# EAGLE board EL-100-020-001-maincontrlunit (EAGLE 6.6.0), part 1 of 2
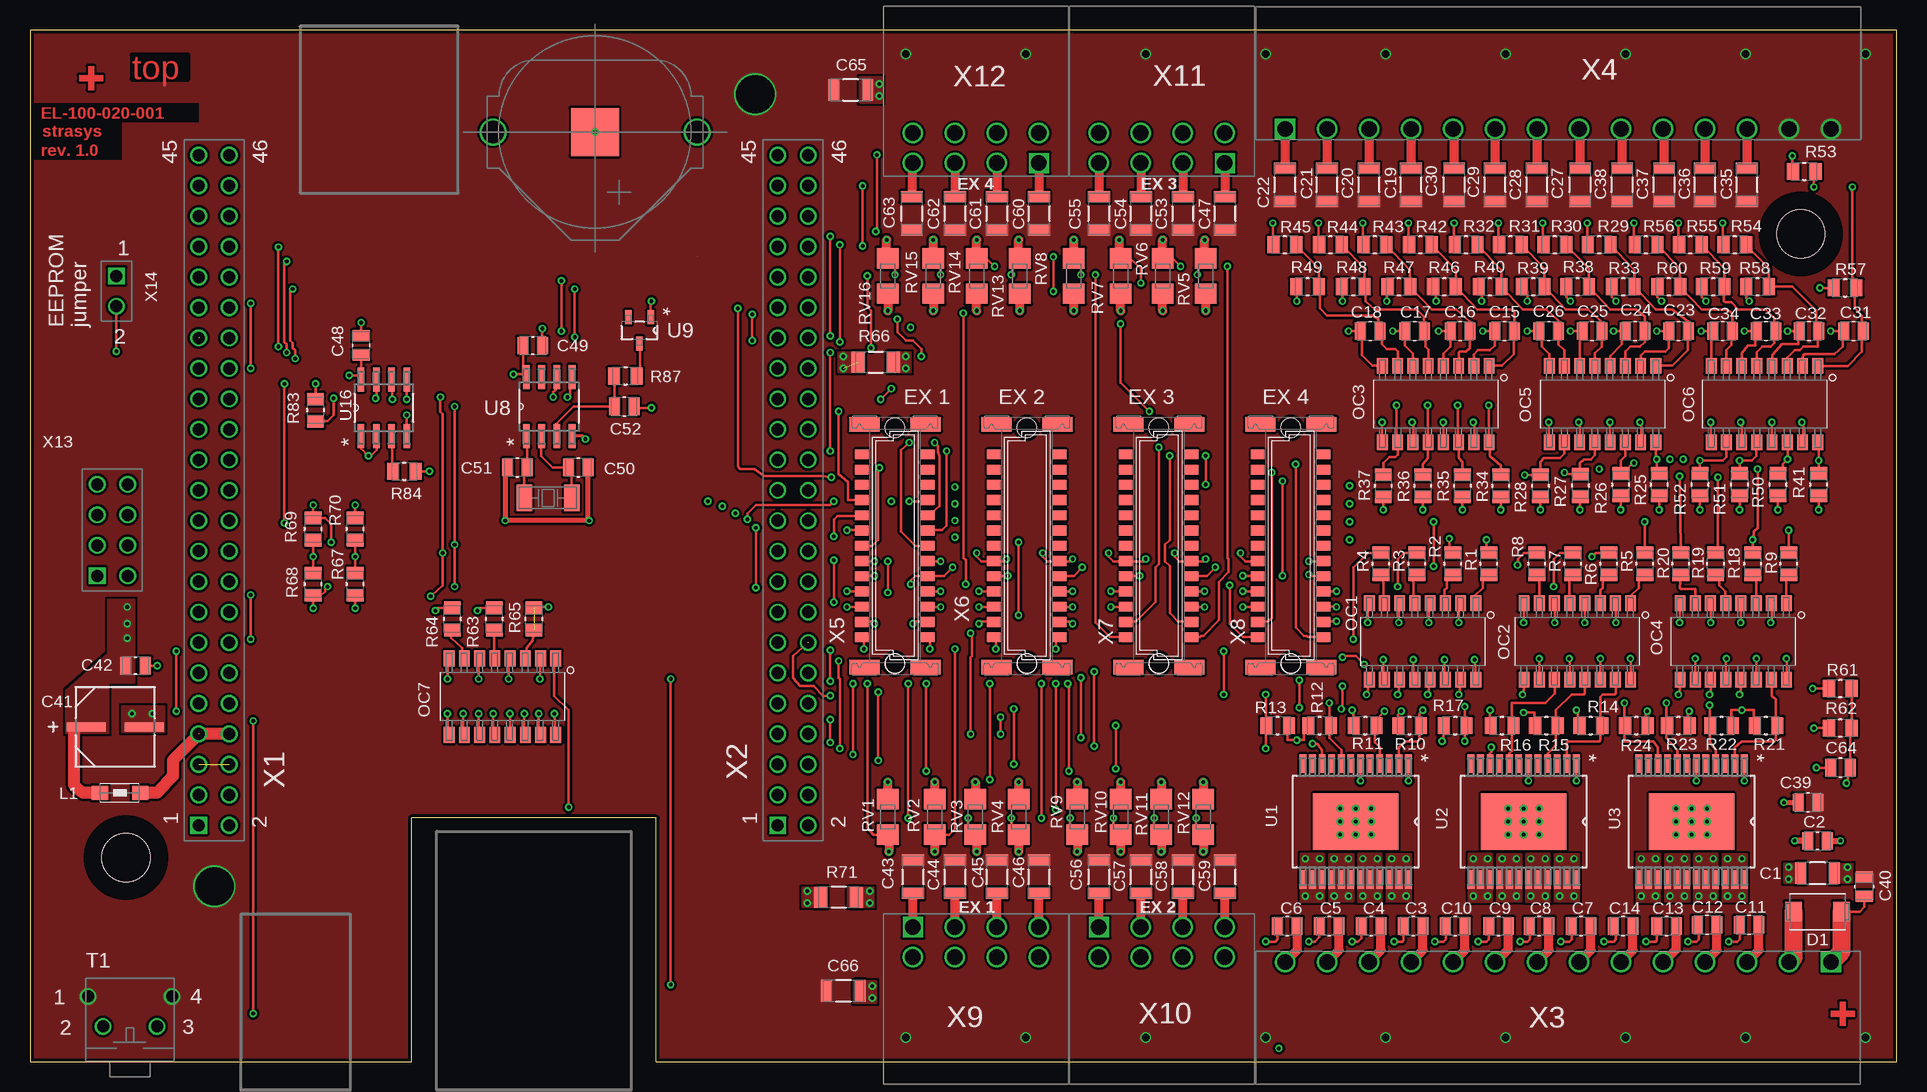
[diagram p0: board, top side]
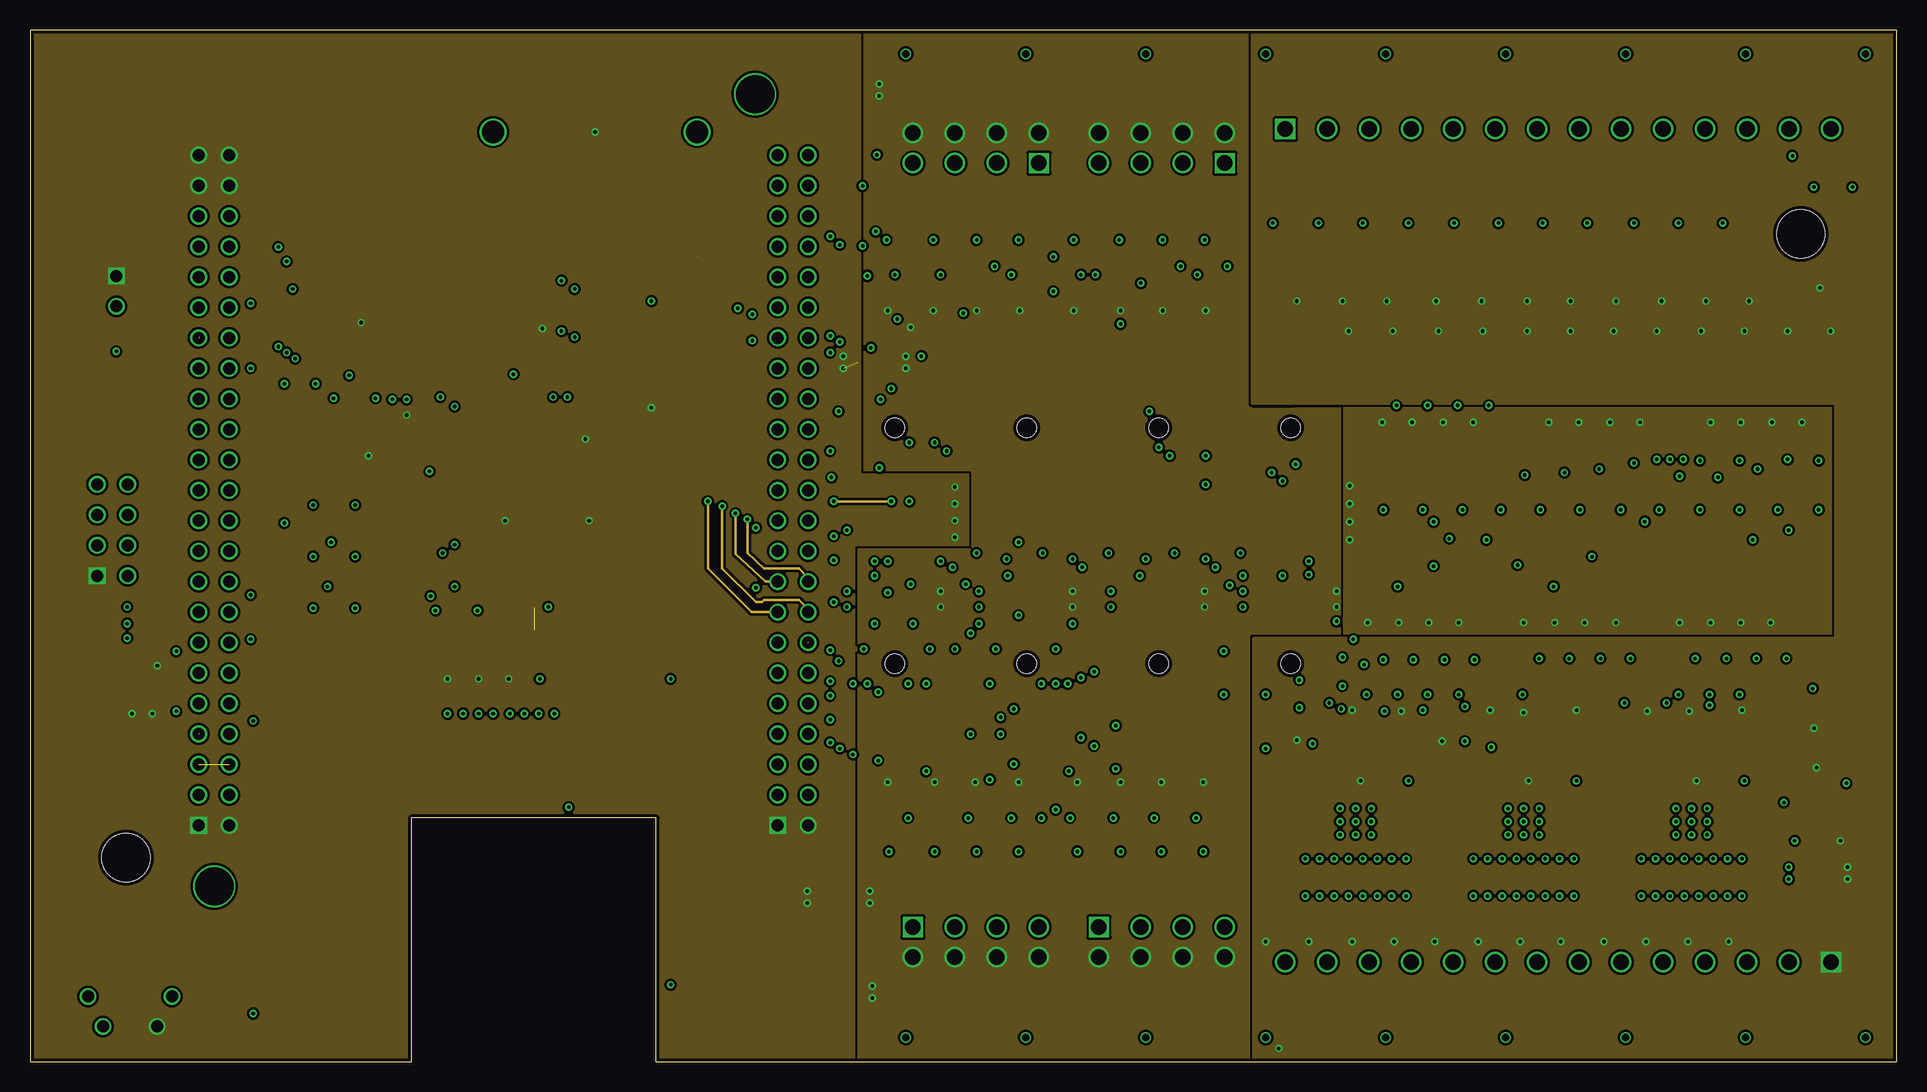
[diagram p1: board, inner layer GND]
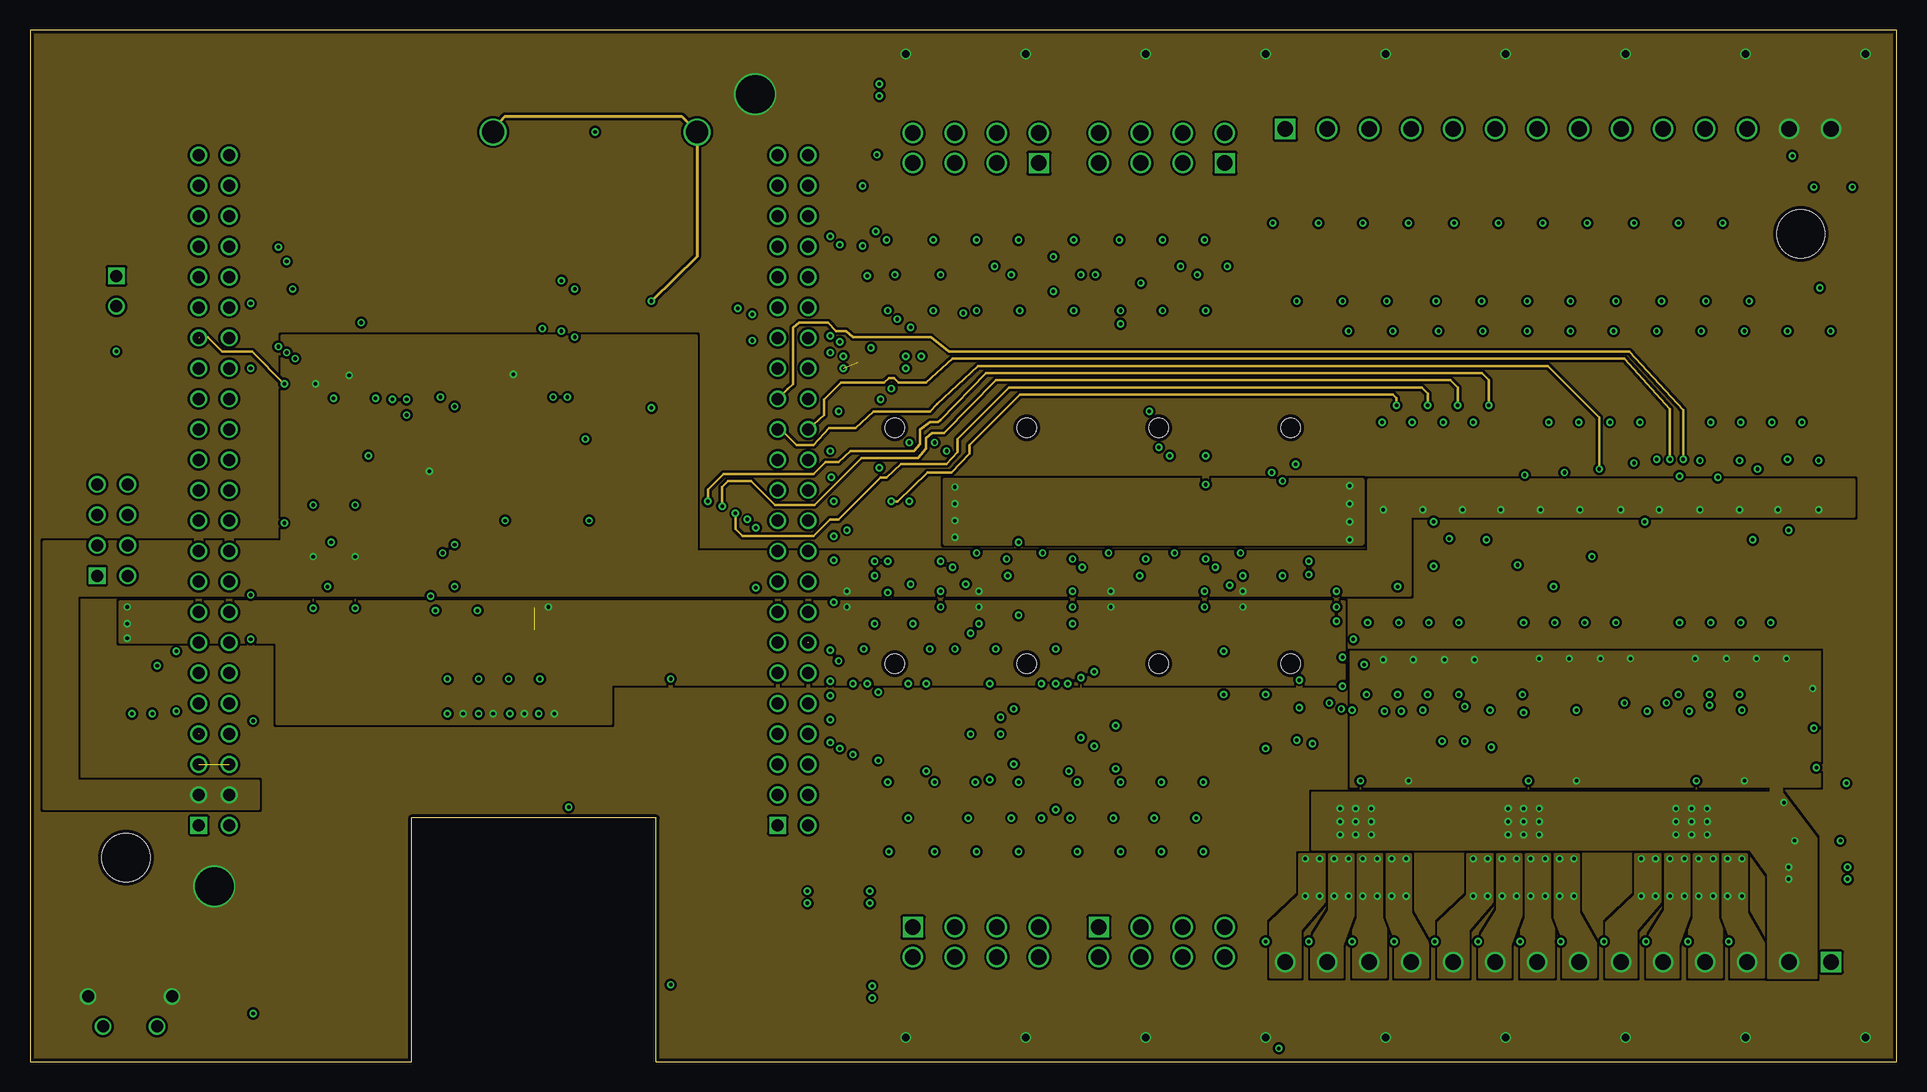
[diagram p2: board, inner layer PWR]
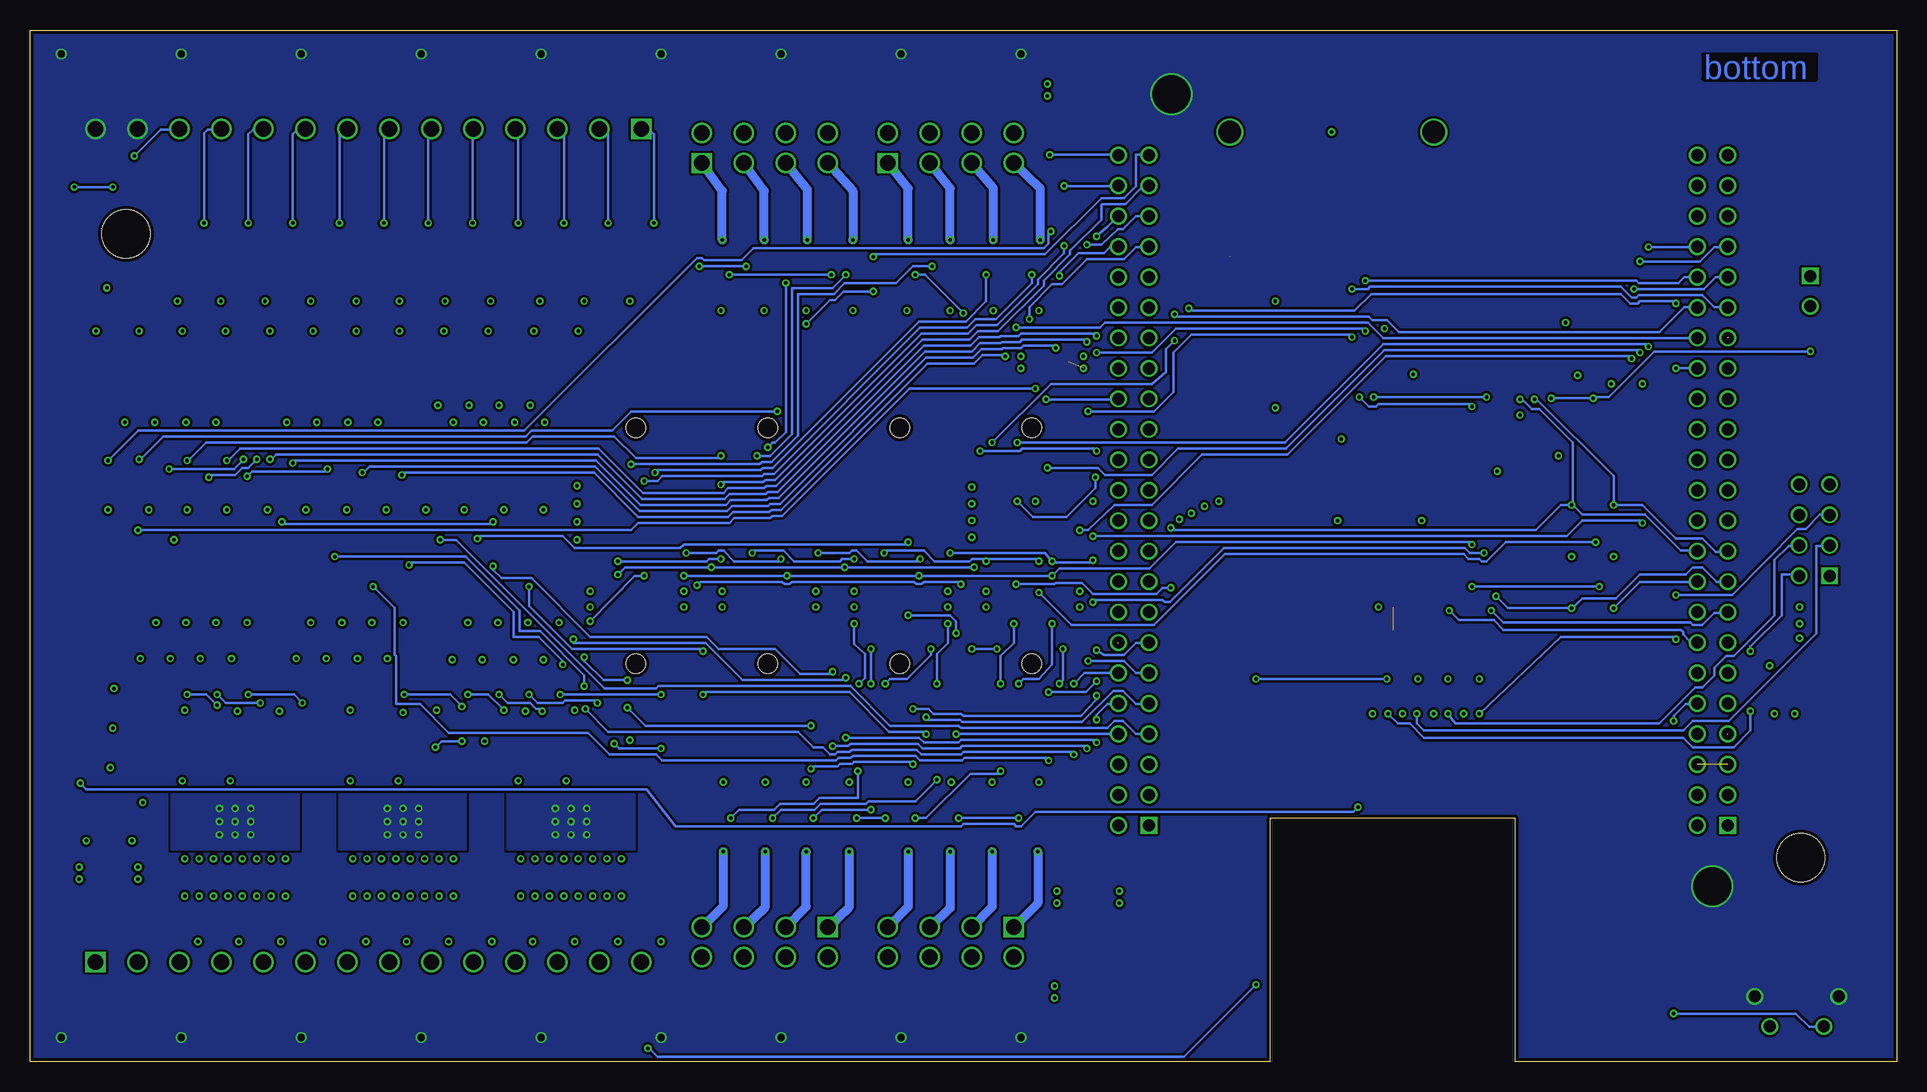
[diagram p3: board, bottom side, seen from below]

Size 155.6 x 86 mm. Coordinates in mm from the lower left corner, seen from the top.
Outline: 0,0 31.8,0 31.8,20.3 52.2,20.3 52.2,0 155.6,0 155.6,86 0,86 0,0
Copper layers (1+2*15+16): Top 0.035mm / dielectric 0.38mm / GND 0.035mm / dielectric 0.71mm / PWR 0.035mm / dielectric 0.38mm / Bottom 0.035mm
Design rules "PCB-POOL Standard_ML4": minimum track width 0.15mm, minimum drill 0.3mm, track to track 0.15mm, track to pad 0.15mm, pad to pad 0.15mm, via to via 0.15mm, smd to smd 0.15mm, copper to edge 0.3mm, drill to drill 0.2mm, minimum pad ring 0.2mm, minimum via ring 0.15mm, stop-mask expansion 0.075mm, vias tented up to drill 0mil, thermal gap 0.2mm
Net classes: 0 default: clearance 0.205 mm
Holes 4 mm at 8,17 147.6,69
tRestrict: area 144.1,65.5 to 151.1,72.5; area 4.5,13.5 to 11.5,20.5

## Footprints (pad centres in the part's own frame; a part is rotated, then mirrored left to right if it is on the bottom)
BAT_HOLDER_16MM = smd 4 x 4: P1(-) 0,0 | drill 1.85: P2(+) 8.5,0; P3(+) -8.5,0
CAPC3216X180N = smd 0.914 x 1.803: 1 -1.397,0; 2 1.397,0
CAPC2013X110N = smd 0.914 x 1.448: 1 -0.813,0; 2 0.813,0
CAPC2013X88N = smd 0.914 x 1.448: 1 -0.813,0; 2 0.813,0
CAPC3216X88N = smd 0.914 x 1.803: 1 -1.397,0; 2 1.397,0
CAPAE660X610N = smd 3.251 x 0.762: 1 -2.413,0; 2 2.413,0
DO-214AC = smd 1.4 x 1.64: 1 -2,0; 2 2,0
1206 = smd 1.35 x 1.2: 1 -1.675,0; 2 1.675,0
SOP-16 = smd 1.3 x 0.9: 1 -3.201,4.423; 2 -3.201,3.153; 3 -3.201,1.883; 4 -3.201,0.613; 5 -3.201,-0.657; 6 -3.201,-1.927; 7 -3.201,-3.197; 8 -3.201,-4.467; 9 3.169,-4.467; 10 3.169,-3.197; 11 3.169,-1.927; 12 3.169,-0.657; 13 3.169,0.613; 14 3.169,1.883; 15 3.169,3.153; 16 3.169,4.423
RESC2013X65N = smd 1.016 x 1.397: 1 -0.94,0; 2 0.94,0
RESC3216X71N = smd 1.118 x 1.753: 1 -1.473,0; 2 1.473,0
WESURGE_0805 = smd 1.7 x 1.8: 1 -1.475,0; 2 1.475,0
WS-TST-90° = drill 1: 1 0,0; 2 1.25,-2.5; 3 5.75,-2.5; 4 7,0
SOP80P1030X247-25N = smd 1.549 x 0.559: 1 -4.826,4.394; 2 -4.826,3.607; 3 -4.826,2.794; 4 -4.826,2.007; 5 -4.826,1.194; 6 -4.826,0.406; 7 -4.826,-0.406; 8 -4.826,-1.194; 9 -4.826,-2.007; 10 -4.826,-2.794; 11 -4.826,-3.607; 12 -4.826,-4.394; 13 4.826,-4.394; 14 4.826,-3.607; 15 4.826,-2.794; 16 4.826,-2.007; 17 4.826,-1.194; 18 4.826,-0.406; 19 4.826,0.406; 20 4.826,1.194; 21 4.826,2.007; 22 4.826,2.794; 23 4.826,3.607; 24 4.826,4.394 | smd 4.699 x 7.112: 25 0,0
SOIC127P600X175-8N = smd 1.981 x 0.559: 1 -2.464,1.905; 2 -2.464,0.635; 3 -2.464,-0.635; 4 -2.464,-1.905; 5 2.464,-1.905; 6 2.464,-0.635; 7 2.464,0.635; 8 2.464,1.905
SOT95P280X145-5N = smd 1.168 x 0.533: 1 -1.092,0.94; 2 -1.092,-0.94; 3 1.092,0
SOIC127P600X175-8N' = smd 1.981 x 0.559: 1 -2.362,1.905; 2 -2.362,0.635; 3 -2.362,-0.635; 4 -2.362,-1.905; 5 2.362,-1.905; 6 2.362,-0.635; 7 2.362,0.635; 8 2.362,1.905
ABS-10 = smd 1.3 x 2.2: P$1 -1.975,0; P$2 1.975,0
2,54_STIFTLEIST_2X23 = drill 1 square: P1 0,0 | drill 1: P2 0,-2.54; P3 2.54,0; P4 2.54,-2.54; P5 5.08,0; P6 5.08,-2.54; P7 7.62,0; P8 7.62,-2.54; P9 10.16,0; P10 10.16,-2.54; P11 12.7,0; P12 12.7,-2.54; P13 15.24,0; P14 15.24,-2.54; P15 17.78,0; P16 17.78,-2.54; P17 20.32,0; P18 20.32,-2.54; P19 22.86,0; P20 22.86,-2.54; P21 25.4,0; P22 25.4,-2.54; P23 27.94,0; P24 27.94,-2.54; P25 30.48,0; P26 30.48,-2.54; P27 33.02,0; P28 33.02,-2.54; P29 35.56,0; P30 35.56,-2.54; P31 38.1,0; P32 38.1,-2.54; P33 40.64,0; P34 40.64,-2.54; P35 43.18,0; P36 43.18,-2.54; P37 45.72,0; P38 45.72,-2.54; P39 48.26,0; P40 48.26,-2.54; P41 50.8,0; P42 50.8,-2.54; P43 53.34,0; P44 53.34,-2.54; P45 55.88,0; P46 55.88,-2.54
90G-14 = drill 1.3 square: 1 0,0 | drill 1.3: 2 -3.5,0; 3 -7,0; 4 -10.5,0; 5 -14,0; 6 -17.5,0; 7 -21,0; 8 -24.5,0; 9 -28,0; 10 -31.5,0; 11 -35,0; 12 -38.5,0; 13 -42,0; 14 -45.5,0
063209 = smd 0.8 x 1.1: A1 -7.62,2.765; A2 -6.35,2.765; A3 -5.08,2.765; A4 -3.81,2.765; A5 -2.54,2.765; A6 -1.27,2.765; A7 0,2.765; A8 1.27,2.765; A9 2.54,2.765; A10 3.81,2.765; A11 5.08,2.765; A12 6.35,2.765; A13 7.62,2.765; B1 -7.62,-2.74; B2 -6.35,-2.74; B3 -5.08,-2.74; B4 -3.81,-2.74; B5 -2.54,-2.74; B6 -1.27,-2.74; B7 0,-2.74; B8 1.27,-2.74; B9 2.54,-2.74; B10 3.81,-2.74; B11 5.08,-2.74; B12 6.35,-2.74; B13 7.62,-2.74 | smd 1.2 x 2.5: M1 -10.125,2.55; M2 -10.125,-2.55; M3 10.125,-2.55; M4 10.125,2.55 | hole 1.6: -9.83,0; 9.83,0
S2L-90G-8 = drill 1.3 square: 1 0,0 | drill 1.3: 2 0,-2.5; 3 3.5,0; 4 3.5,-2.5; 5 7,0; 6 7,-2.5; 7 10.5,0; 8 10.5,-2.5
2,54_2X8 = drill 1 square: P1 0,0 | drill 1: P2 0,-2.54; P3 2.54,0; P4 2.54,-2.54; P5 5.08,0; P6 5.08,-2.54; P7 7.62,0; P8 7.62,-2.54
2,54_2X1 = drill 1 square: P1 0,0 | drill 1: P2 0,-2.54

## Placement (x,y rotation side)
BAT1  BATTERY_COIN_CLIP  [BAT_HOLDER_16MM]  47.1,77.5 0 top
C1  2.2uF  [CAPC3216X180N]  149,15.7 180 top
C2  100nF  [CAPC2013X110N]  149,18.4 180 top
C3  10nF  [CAPC2013X88N]  115.3,11.3 0 top
C4  10nF  [CAPC2013X88N]  111.8,11.3 0 top
C5  10nF  [CAPC2013X88N]  108.3,11.3 0 top
C6  10nF  [CAPC2013X88N]  104.8,11.3 0 top
C7  10nF  [CAPC2013X88N]  129.3,11.3 0 top
C8  10nF  [CAPC2013X88N]  125.8,11.3 0 top
C9  10nF  [CAPC2013X88N]  122.4,11.3 0 top
C10  10nF  [CAPC2013X88N]  118.8,11.3 0 top
C11  10nF  [CAPC2013X88N]  143.3,11.4 0 top
C12  10nF  [CAPC2013X88N]  139.8,11.4 0 top
C13  10nF  [CAPC2013X88N]  136.4,11.3 0 top
C14  10nF  [CAPC2013X88N]  132.8,11.3 0 top
C15  10nF  [CAPC2013X88N]  122.9,60.9 0 top
C16  10nF  [CAPC2013X88N]  119.2,60.9 0 top
C17  10nF  [CAPC2013X88N]  115.4,60.9 0 top
C18  10nF  [CAPC2013X88N]  111.7,60.9 0 top
C19  1000pF  [CAPC3216X88N]  115.1,73.1 90 top
C20  1000pF  [CAPC3216X88N]  111.6,73.1 90 top
C21  1000pF  [CAPC3216X88N]  108.1,73.1 90 top
C22  1000pF  [CAPC3216X88N]  104.6,73.1 90 top
C23  10nF  [CAPC2013X88N]  137.4,60.9 0 top
C24  10nF  [CAPC2013X88N]  133.8,60.9 0 top
C25  10nF  [CAPC2013X88N]  130.2,60.9 0 top
C26  10nF  [CAPC2013X88N]  126.6,60.9 0 top
C27  1000pF  [CAPC3216X88N]  129.2,73.1 90 top
C28  1000pF  [CAPC3216X88N]  125.6,73.1 90 top
C29  1000pF  [CAPC3216X88N]  122.1,73.1 90 top
C30  1000pF  [CAPC3216X88N]  118.7,73.1 90 top
C31  10nF  [CAPC2013X88N]  152,60.9 0 top
C32  10nF  [CAPC2013X88N]  148.3,60.9 0 top
C33  10nF  [CAPC2013X88N]  144.7,60.9 0 top
C34  10nF  [CAPC2013X88N]  141.1,60.9 0 top
C35  1000pF  [CAPC3216X88N]  143.1,73.1 90 top
C36  1000pF  [CAPC3216X88N]  139.6,73.1 90 top
C37  1000pF  [CAPC3216X88N]  136.2,73.1 90 top
C38  1000pF  [CAPC3216X88N]  132.7,73.1 90 top
C39  4700pF  [CAPC2013X88N]  148.2,21.6 0 top
C40  4700pF  [CAPC2013X88N]  152.9,14.6 270 top
C41  47UF  [CAPAE660X610N]  7.1,27.9 0 top
C42  100nF  [CAPC2013X110N]  8.8,33 180 top
C43  1000pF  [CAPC3216X88N]  73.6,15.4 270 top
C44  1000pF  [CAPC3216X88N]  77.1,15.4 270 top
C45  1000pF  [CAPC3216X88N]  80.6,15.4 270 top
C46  1000pF  [CAPC3216X88N]  84.1,15.4 270 top
C47  1000pF  [CAPC3216X88N]  99.6,70.7 90 top
C48  100nF  [CAPC2013X110N]  27.6,59.7 270 top
C49  100nF  [CAPC2013X110N]  41.91,59.69 180 top
C50  12pF  [CAPC2013X88N]  45.72,49.53 180 top
C51  10pF  [CAPC2013X88N]  40.64,49.53 0 top
C52  100pF  [CAPC2013X88N]  49.53,54.61 180 top
C53  1000pF  [CAPC3216X88N]  96.1,70.7 90 top
C54  1000pF  [CAPC3216X88N]  92.6,70.7 90 top
C55  1000pF  [CAPC3216X88N]  89.1,70.7 90 top
C56  1000pF  [CAPC3216X88N]  89.1,15.4 270 top
C57  1000pF  [CAPC3216X88N]  92.6,15.4 270 top
C58  1000pF  [CAPC3216X88N]  96.1,15.4 270 top
C59  1000pF  [CAPC3216X88N]  99.6,15.4 270 top
C60  1000pF  [CAPC3216X88N]  84.1,70.7 90 top
C61  1000pF  [CAPC3216X88N]  80.6,70.7 90 top
C62  1000pF  [CAPC3216X88N]  77.1,70.7 90 top
C63  1000pF  [CAPC3216X88N]  73.5,70.7 90 top
C64  10nF  [CAPC2013X88N]  150.9,24.5 0 top
C65  1000pF  [CAPC3216X88N]  68.4,81 180 top
C66  1000pF  [CAPC3216X88N]  67.8,5.9 180 top
D1  [DO-214AC]  149,12.5 180 top
L1  [1206]  7.5,22.4 180 top
OC1  TCMT4106  [SOP-16]  116.1,35 270 top
OC2  TCMT4106  [SOP-16]  129,35 270 top
OC3  TCMT4106  [SOP-16]  117.2,54.8 270 top
OC4  TCMT4106  [SOP-16]  142,35 270 top
OC5  TCMT4106  [SOP-16]  131.1,54.8 270 top
OC6  TCMT4106  [SOP-16]  144.6,54.8 270 top
OC7  TCMT4106  [SOP-16]  39.4,30.4 270 top
R1  1K Ohms  [RESC2013X65N]  121.6,41.5 270 top
R2  1K Ohms  [RESC2013X65N]  118.6,41.5 270 top
R3  1K Ohms  [RESC2013X65N]  115.6,41.5 270 top
R4  1K Ohms  [RESC2013X65N]  112.6,41.5 270 top
R5  1K Ohms  [RESC2013X65N]  134.6,41.5 270 top
R6  1K Ohms  [RESC2013X65N]  131.6,41.5 270 top
R7  1K Ohms  [RESC2013X65N]  128.6,41.5 270 top
R8  1K Ohms  [RESC2013X65N]  125.6,41.5 270 top
R9  1K Ohms  [RESC2013X65N]  146.6,41.5 270 top
R10  47K Ohms  [RESC2013X65N]  115,28 180 top
R11  47K Ohms  [RESC2013X65N]  111.3,28 180 top
R12  47K Ohms  [RESC2013X65N]  107.5,28 180 top
R13  47K Ohms  [RESC2013X65N]  104,28 0 top
R14  47K Ohms  [RESC2013X65N]  130.1,28 180 top
R15  47K Ohms  [RESC2013X65N]  126.4,28 180 top
R16  47K Ohms  [RESC2013X65N]  122.7,28 180 top
R17  47K Ohms  [RESC2013X65N]  118.8,28 180 top
R18  1K Ohms  [RESC2013X65N]  143.6,41.5 270 top
R19  1K Ohms  [RESC2013X65N]  140.5,41.5 270 top
R20  1K Ohms  [RESC2013X65N]  137.6,41.5 270 top
R21  47K Ohms  [RESC2013X65N]  144.7,28 180 top
R22  47K Ohms  [RESC2013X65N]  141,28 0 top
R23  47K Ohms  [RESC2013X65N]  137.4,28 0 top
R24  47K Ohms  [RESC2013X65N]  133.9,28 0 top
R25  4.7K Ohms  [RESC2013X65N]  135.8,48.1 270 top
R26  4.7K Ohms  [RESC2013X65N]  132.6,48.1 270 top
R27  4.7K Ohms  [RESC2013X65N]  129.24,48.03 270 top
R28  4.7K Ohms  [RESC2013X65N]  125.9,48 270 top
R29  4.7K Ohms  [RESC2013X65N]  130.8,68.1 0 top
R30  4.7K Ohms  [RESC2013X65N]  127.1,68.1 0 top
R31  4.7K Ohms  [RESC2013X65N]  123.4,68.1 0 top
R32  4.7K Ohms  [RESC2013X65N]  119.7,68.1 0 top
R33  1K Ohms  [RESC2013X65N]  132.8,64.6 180 top
R34  4.7K Ohms  [RESC2013X65N]  122.6,48 270 top
R35  4.7K Ohms  [RESC2013X65N]  119.4,48 270 top
R36  4.7K Ohms  [RESC2013X65N]  116.1,48 270 top
R37  4.7K Ohms  [RESC2013X65N]  112.8,48 270 top
R38  1K Ohms  [RESC2013X65N]  129,64.6 180 top
R39  1K Ohms  [RESC2013X65N]  125.3,64.6 180 top
R40  1K Ohms  [RESC2013X65N]  121.7,64.6 180 top
R41  4.7K Ohms  [RESC2013X65N]  149.1,48.1 270 top
R42  4.7K Ohms  [RESC2013X65N]  115.9,68.1 0 top
R43  4.7K Ohms  [RESC2013X65N]  112.1,68.1 0 top
R44  4.7K Ohms  [RESC2013X65N]  108.4,68.1 0 top
R45  4.7K Ohms  [RESC2013X65N]  104.6,68.1 0 top
R46  1K Ohms  [RESC2013X65N]  117.9,64.6 180 top
R47  1K Ohms  [RESC2013X65N]  114.1,64.6 180 top
R48  1K Ohms  [RESC2013X65N]  110.3,64.6 180 top
R49  1K Ohms  [RESC2013X65N]  106.5,64.6 180 top
R50  4.7K Ohms  [RESC2013X65N]  145.7,48.1 270 top
R51  4.7K Ohms  [RESC2013X65N]  142.5,48.1 270 top
R52  4.7K Ohms  [RESC2013X65N]  139.2,48.1 270 top
R53  4.7K Ohms  [RESC2013X65N]  147.9,74.2 0 top
R54  4.7K Ohms  [RESC2013X65N]  142.1,68.1 0 top
R55  4.7K Ohms  [RESC2013X65N]  138.4,68.1 0 top
R56  4.7K Ohms  [RESC2013X65N]  134.7,68.1 0 top
R57  1K Ohms  [RESC2013X65N]  151.3,64.5 180 top
R58  1K Ohms  [RESC2013X65N]  144,64.6 180 top
R59  1K Ohms  [RESC2013X65N]  140.3,64.6 180 top
R60  1K Ohms  [RESC2013X65N]  136.6,64.6 180 top
R61  4.7K Ohms  [RESC2013X65N]  150.9,31.1 0 top
R62  1K Ohms  [RESC2013X65N]  150.9,27.8 180 top
R63  1K Ohms  [RESC2013X65N]  38.7,36.9 270 top
R64  1K Ohms  [RESC2013X65N]  35.2,36.9 270 top
R65  1K Ohms  [RESC2013X65N]  42,36.9 90 top
R66  0 Ohms  [RESC3216X71N]  70.5,58.3 0 top
R67  10K Ohms  [RESC2013X65N]  27.1,39.8 270 top
R68  10K Ohms  [RESC2013X65N]  23.6,39.8 270 top
R69  10K Ohms  [RESC2013X65N]  23.6,44.4 90 top
R70  10K Ohms  [RESC2013X65N]  27.1,44.4 90 top
R71  0 Ohms  [RESC3216X71N]  67.4,13.7 0 top
R83  10K Ohms  [RESC2013X65N]  23.8,54.3 270 top
R84  10K Ohms  [RESC2013X65N]  31.2,49.2 180 top
R87  1K Ohms  [RESC2013X65N]  49.63,57.15 0 top
RV1  [WESURGE_0805]  71.5,20.4 270 top
RV2  [WESURGE_0805]  75.4,20.4 270 top
RV3  [WESURGE_0805]  78.8,20.4 270 top
RV4  [WESURGE_0805]  82.4,20.4 270 top
RV5  [WESURGE_0805]  98,65.5 90 top
RV6  [WESURGE_0805]  94.4,65.5 90 top
RV7  [WESURGE_0805]  90.9,65.5 90 top
RV8  [WESURGE_0805]  87,65.5 90 top
RV9  [WESURGE_0805]  87.3,20.4 270 top
RV10  [WESURGE_0805]  90.9,20.4 270 top
RV11  [WESURGE_0805]  94.3,20.4 270 top
RV12  [WESURGE_0805]  97.8,20.4 270 top
RV13  [WESURGE_0805]  82.5,65.5 90 top
RV14  [WESURGE_0805]  78.9,65.5 90 top
RV15  [WESURGE_0805]  75.3,65.5 90 top
RV16  [WESURGE_0805]  71.5,65.5 90 top
T1  WS-TST-90°  [WS-TST-90°]  4.84,5.42 0 top
U1  VNI4140K-32  [SOP80P1030X247-25N]  110.5,20 270 top
U2  VNI4140K-32  [SOP80P1030X247-25N]  124.5,20 270 top
U3  VNI4140K-32  [SOP80P1030X247-25N]  138.5,20 270 top
U8  MCP7940N-I/SN  [SOIC127P600X175-8N]  43.28,54.61 90 top
U9  PMEG2005ET  [SOT95P280X145-5N]  50.8,60.96 270 top
U16  24AA256-I/SN  [SOIC127P600X175-8N']  29.5,54.5 90 top
U19  ABS10-32.768KHZ-7-T  [ABS-10]  43.18,46.99 0 top
U$1  [PASSER_SMD4]  5.1,82 0 top
U$2  [PASSER_SMD4]  151.1,4 0 top
X1  944-12-46-00  [2,54_STIFTLEIST_2X23]  14.07,19.68 90 top
X2  944-12-46-00  [2,54_STIFTLEIST_2X23]  62.33,19.68 90 top
X3  90G-14  [90G-14]  150.13,8.29 0 top
X4  90G-14  [90G-14]  104.64,77.74 180 top
X5  Q-063209  [063209]  72.1,43 90 top
X6  Q-063209  [063209]  83.1,43 90 top
X7  Q-063209  [063209]  94.1,43 90 top
X8  Q-063209  [063209]  105.1,43 90 top
X9  S2L3.50/8/90G  [S2L-90G-8]  73.6,11.2 0 top
X10  S2L3.50/8/90G  [S2L-90G-8]  89.1,11.2 0 top
X11  S2L3.50/8/90G  [S2L-90G-8]  99.6,74.9 180 top
X12  S2L3.50/8/90G  [S2L-90G-8]  84.1,74.9 180 top
X13  140-08-FLACHBAND1.27  [2,54_2X8]  5.6,40.5 90 top
X14  944-12-2-00  [2,54_2X1]  7.2,65.5 0 top

## Library data of the parts
BAT1 = strasys_standard; MF: KEYSTONE; MPN: 3013; OC_FARNELL: 1650698; PACKAGE: 16mm; SUPPLIER: Keystone
C1 = Kemet_By_element14_1; MPN: C1206C225K5RACTU; OC_FARNELL: 1288208; OC_NEWARK: 88K0223; SUPPLIER: Kemet; TOLERANCE: ±10%; VOLTAGERATING: 50V
C2 C48 C49 = Kemet_By_element14_1; MF: KEMET; MPN: C0805C104K5RACTU; OC_FARNELL: 1414664; OC_NEWARK: 65H7431; SUPPLIER: Kemet; TOLERANCE: ±10%; VOLTAGERATING: 50V
C3-C18 C23-C26 C31-C34 C64 = Kemet_By_element14_1; MF: KEMET; MPN: C0805C103K1RACTU; OC_FARNELL: 1414661; OC_NEWARK: 99B3817; SUPPLIER: Kemet; TOLERANCE: ±10%; VOLTAGERATING: 100V
C19-C22 C27-C30 C35-C38 C43-C47 C53-C63 C65 C66 = supply2; MF: KEMET; MPN: C1206C102KDRACTU; OC_FARNELL: 1826304; SUPPLIER: Kemet; TOLERANCE: +/- 10%; VOLTAGE_RATING: 1000V
C39 C40 = Kemet_By_element14_1; MPN: C0805F472K1RACAUTO; OC_FARNELL: 1869057; OC_NEWARK: 32T6750; SUPPLIER: KEMET; TOLERANCE: ±10%; VOLTAGERATING: 100V
C41 = strasys_standard; MPN: EEE-FK1C470P; OC_FARNELL: 1850100; OC_NEWARK: 23T0848; PACKAGE: CASE-D; SUPPLIER: PANASONIC; TOLERANCE: ±20 %; VOLTAGERATING: 16V
C42 = Kemet_By_element14_1; MPN: C0805C104K5RACTU; OC_FARNELL: 1414664; OC_NEWARK: 65H7431; SUPPLIER: Kemet; TOLERANCE: ±10%; VOLTAGERATING: 50V
C50 = Kemet_By_element14_1; MF: KEMET; MPN: C0805C120J5GACTU; OC_FARNELL: 1414666; OC_NEWARK: 64K2898; SUPPLIER: Kemet; TOLERANCE: ±5%; VOLTAGERATING: 50V
C51 = Kemet_By_element14_1; MF: KEMET; MPN: C0805C100J5GACTU; OC_FARNELL: 1414654; OC_NEWARK: 64K2873; SUPPLIER: Kemet; TOLERANCE: ±5%; VOLTAGERATING: 50V
C52 = Kemet_By_element14_1; MF: KEMET; MPN: C0805C101J5GACTU; OC_FARNELL: 1414656; OC_NEWARK: 19C6007; SUPPLIER: Kemet; TOLERANCE: ±5%; VOLTAGERATING: 50V
D1 = strasys_standard; MPN: SMA6J33CA-TR; OC_FARNELL: 1689245; PACKAGE: DO-214AC; SUPPLIER: ST-Microelectronics
L1 = WE-CBF; MPN: 74279218; OC_FARNELL: 1635758; OC_NEWARK: 08P2403; PACKAGE: IND-1206; SUPPLIER: Wuerth Elektronik
OC1-OC7 = strasys_standard; MANUFACTURER: Vishay; MPN: TMCT4106; PACKAGE: SOT-16
R1-R9 R18-R20 R33 R38-R40 R46-R49 R57-R60 R62-R65 = Vishay_By_element14_Batch_1; MF: VISHAY DRALORIC; MPN: CRCW08051K00JNEA; OC_FARNELL: 1652937; OC_NEWARK: 52K9725; SUPPLIER: Vishay; TOLERANCE: ±5%; WATTAGE: 0.125 W
R10-R17 R21-R24 = Vishay_By_element14_Batch_1; MF: VISHAY DRALORIC; MPN: CRCW080547K0JNEA; OC_FARNELL: 1514867; OC_NEWARK: 59M6914; SUPPLIER: VISHAY DALE ELECTRONICS; TOLERANCE: ±5%; WATTAGE: 0.125 W
R25-R32 R34-R37 R41-R45 R50-R56 R61 = Vishay_By_element14_Batch_1; MF: VISHAY DRALORIC; MPN: CRCW08054K70JNEB; OC_FARNELL: 1872057; OC_NEWARK: 65J2003; SUPPLIER: Vishay Dale; TOLERANCE: ±5%; WATTAGE: 0.125W
R66 R71 = Vishay_By_element14_Batch_1; MPN: CRCW12060000Z0EA; OC_FARNELL: 1469963; OC_NEWARK: 53K1778; SUPPLIER: Vishay; TOLERANCE: -; WATTAGE: 0.25W
R67-R70 R83 R84 = Vishay_By_element14_Batch_1; MF: VISHAY DRALORIC; MPN: CRCW080510K0JNEA; OC_FARNELL: 1469857; OC_NEWARK: 52K9797; SUPPLIER: Vishay; TOLERANCE: ±5%; WATTAGE: 0.125 W
R87 = Vishay_By_element14_Batch_1; MF: VISHAY DRALORIC; MPN: CRCW08051K00FKEA; OC_FARNELL: 1469847; OC_NEWARK: 52K9723; SUPPLIER: Vishay; TOLERANCE: ±1%; WATTAGE: 0.125 W
RV1-RV16 = WE-VS; MPN: 82550110; OC_FARNELL: 1636441; OC_NEWARK: 08P3035; PACKAGE: 0805; SUPPLIER: WURTH ELEKTRONIK
T1 = strasys_standard; MF: WURTH ELEKTRONIK; MPN: 431256038726; OC_FARNELL: 2065135; SUPPLIER: Wuerth Electronic
U1-U3 = strasys_standard; MF: STMICROELECTRONICS; MPN: VNI4140K-32; OC_FARNELL: 2309423; OC_MOUSER: 511-VNI4140KTR-32; PACKAGE: SO-24; SUPPLIER: STMICROELECTRONICS
U8 = Microchip-MCP7940N-I_SN; MF: MICROCHIP; MPN: MCP7940N-I/SN; OC_FARNELL: 2361122; OC_NEWARK: 26T2748; PACKAGE: SOIC-8; SUPPLIER: MICROCHIP
U9 = strasys_standard; MF: NXP; MPN: PMEG2005ET; OC_FARNELL: 1510672; PACKAGE: SOT-23-3; SUPPLIER: NXP
U16 = Microchip_By_element14_Batch_1; MF: MICROCHIP; MPN: 24AA256-I/SN; OC_FARNELL: 1331295; OC_NEWARK: 92C6874; PACKAGE: SOIC-8; SUPPLIER: MICROCHIP
U19 = strasys_standard; MF: ABRACON; MPN: ABS10-32.768KHZ-7-T; OC_FARNELL: 2101351; SUPPLIER: ABRACON
U$1 U$2 = marks
X1 X2 = strasys_standard; MPN: 944-12-46-00; SUPPLIER: W+P
X3 X4 = strasys_standard; MPN: SL 3.50/14/90G; SUPPLIER: Weidmüller
X5-X8 = con-erni; OC_FARNELL: unknown; OC_NEWARK: unknown
X9-X12 = strasys_standard; SUPPLIER: Weidmüller
X13 X14 = strasys_standard

## Nets
0V: C1.1 C2.1 C3.1 C4.1 C5.1 C6.1 C7.1 C8.1 C9.1 C10.1 C11.1 C12.1 C13.1 C14.1 C15.1 C16.1 C17.1 C18.1 C23.1 C24.1 C25.1 C26.1 C31.1 C32.1 C33.1 C34.1 C40.2 C64.1 D1.1 OC3.2 OC3.4 OC3.6 OC3.8 OC5.2 OC5.4 OC5.6 OC5.8 OC6.2 OC6.4 OC6.6 OC6.8 OC7.2 R10.2 R11.2 R12.2 R13.2 R14.2 R15.2 R16.2 R17.2 R21.2 R22.2 R23.2 R24.2 R33.2 R38.2 R39.2 R40.2 R46.2 R47.2 R48.2 R49.2 R57.2 R58.2 R59.2 R60.2 R62.2 U1.6 U2.6 U3.6 X3.1
24AA_WP: R83.2 U16.7 X14.P2
+3.3V: C48.2 C49.2 R25.2 R26.2 R27.2 R28.2 R34.2 R35.2 R36.2 R37.2 R41.2 R50.2 R51.2 R52.2 R67.1 R68.1 R69.1 R70.1 R83.1 R84.1 U8.8 U16.8 X1.P3 X1.P4 X5.A4 X6.A4 X7.A4 X8.A4
+24V: C1.2 C2.2 C39.1 D1.2 OC1.10 OC1.12 OC1.14 OC1.16 OC2.10 OC2.12 OC2.14 OC2.16 OC4.10 OC4.12 OC4.14 OC4.16 R61.1 U1.1 U1.25 U2.1 U2.25 U3.1 U3.25 X3.2
+24V_ON: OC7.15 X13.P2
AGND: C65.1 C66.1 R66.2 R71.2 RV1.1 RV2.1 RV3.1 RV4.1 RV5.1 RV6.1 RV7.1 RV8.1 RV9.1 RV10.1 RV11.1 RV12.1 RV13.1 RV14.1 RV15.1 RV16.1 X1.P34 X5.B3 X5.B4 X6.B3 X6.B4 X7.B3 X7.B4 X8.B3 X8.B4 X9.2 X9.4 X9.6 X9.8 X10.2 X10.4 X10.6 X10.8 X11.2 X11.4 X11.6 X11.8 X12.2 X12.4 X12.6 X12.8
AIN0: X1.P39 X5.A7
AIN1: X1.P40 X5.B7
AIN2: X1.P37 X5.A8
AIN3: X1.P38 X5.B8
AIN4: X1.P33 X5.A9
AIN5: X1.P36 X5.B9
AIN6: X1.P35 X5.A10
ANA_1.1: C43.2 RV1.2 X5.A1 X9.1
ANA_1.2: C44.2 RV2.2 X5.B1 X9.3
ANA_1.3: C45.2 RV3.2 X5.A2 X9.5
ANA_1.4: C46.2 RV4.2 X5.B2 X9.7
ANA_2.1: C56.2 RV9.2 X6.A1 X10.1
ANA_2.2: C57.2 RV10.2 X6.B1 X10.3
ANA_2.3: C58.2 RV11.2 X6.A2 X10.5
ANA_2.4: C59.2 RV12.2 X6.B2 X10.7
ANA_3.1: C47.2 RV5.2 X7.A1 X11.1
ANA_3.2: C53.2 RV6.2 X7.B1 X11.3
ANA_3.3: C54.2 RV7.2 X7.A2 X11.5
ANA_3.4: C55.2 RV8.2 X7.B2 X11.7
ANA_4.1: C60.2 RV13.2 X8.A1 X12.1
ANA_4.2: C61.2 RV14.2 X8.B1 X12.3
ANA_4.3: C62.2 RV15.2 X8.A2 X12.5
ANA_4.4: C63.2 RV16.2 X8.B2 X12.7
BAT-SUPPLY: BAT1.P2(+) U9.1
DGND: BAT1.P1(-) C41.2 C42.1 C48.1 C49.1 C50.1 C51.1 C52.1 OC1.2 OC1.4 OC1.6 OC1.8 OC2.2 OC2.4 OC2.6 OC2.8 OC3.9 OC3.11 OC3.13 OC3.15 OC4.2 OC4.4 OC4.6 OC4.8 OC5.9 OC5.11 OC5.13 OC5.15 OC6.9 OC6.11 OC6.13 OC6.15 OC7.4 OC7.6 OC7.8 R66.1 R71.1 T1.3 U8.4 U16.1 U16.2 U16.4 X1.P1 X1.P2 X1.P43 X1.P44 X1.P45 X1.P46 X2.P1 X2.P2 X13.P1 X14.P1
ERROR: OC7.9 X13.P5
HEARTBEAT: OC7.11 X13.P4
I2C1_SCL: R67.2 U8.6 X1.P17 X5.A6 X6.A6 X7.A6 X8.A6
I2C1_SDA: R68.2 U8.5 X1.P18 X5.A5 X6.A5 X7.A5 X8.A5
I2C2_SCL: R69.2 U16.6 X1.P19 X5.B6 X6.B6 X7.B6 X8.B6
I2C2_SDA: R70.2 U16.5 X1.P20 X5.B5 X6.B5 X7.B5 X8.B5
IN_1: C22.2 R45.1 X4.1
IN_2: C21.2 R44.1 X4.2
IN_3: C20.2 R43.1 X4.3
IN_4: C19.2 R42.1 X4.4
IN_5: C30.2 R32.1 X4.5
IN_6: C29.2 R31.1 X4.6
IN_7: C28.2 R30.1 X4.7
IN_8: C27.2 R29.1 X4.8
IN_9: C38.2 R56.1 X4.9
IN_10: C37.2 R55.1 X4.10
IN_11: C36.2 R54.1 X4.11
IN_12: C35.2 R53.1 X4.12
N$5: R84.2 U16.3
N$6: OC1.5 R3.2
N$7: OC1.7 R4.2
N$8: OC2.3 R6.2
N$9: OC2.5 R7.2
N$10: OC2.7 R8.2
N$11: OC4.1 R9.2
N$12: OC4.15 R21.1 U3.2
N$13: OC4.13 R22.1 U3.4
N$14: OC1.1 R1.2
N$15: OC1.3 R2.2
N$16: OC4.11 R23.1 U3.8
N$17: OC4.9 R24.1 U3.10
N$18: OC4.3 R18.2
N$19: OC1.15 R10.1 U1.2
N$20: OC1.13 R11.1 U1.4
N$21: OC1.11 R12.1 U1.8
N$22: OC1.9 R13.1 U1.10
N$23: OC2.1 R5.2
N$24: OC4.5 R19.2
N$25: OC4.7 R20.2
N$26: C23.2 OC5.1 R29.2 R33.1
N$27: OC2.15 R14.1 U2.2
N$28: OC2.13 R15.1 U2.4
N$29: OC2.11 R16.1 U2.8
N$30: OC2.9 R17.1 U2.10
N$31: C24.2 OC5.3 R30.2 R38.1
N$32: C25.2 OC5.5 R31.2 R39.1
N$33: C26.2 OC5.7 R32.2 R40.1
N$34: C15.2 OC3.1 R42.2 R46.1
N$35: C31.2 OC6.1 R53.2 R57.1
N$36: C16.2 OC3.3 R43.2 R47.1
N$37: C32.2 OC6.3 R54.2 R58.1
N$38: C33.2 OC6.5 R55.2 R59.1
N$39: C34.2 OC6.7 R56.2 R60.1
N$40: C64.2 OC7.1 R61.2 R62.1
N$41: OC7.5 R63.2
N$42: C17.2 OC3.5 R44.2 R48.1
N$43: OC7.7 R64.2
N$46: R87.2 U9.3
N$47: C52.2 R87.1 U8.3
N$48: C50.2 U8.2 U19.P$2
N$49: C18.2 OC3.7 R45.2 R49.1
N$51: C51.2 U8.1 U19.P$1
N$52: X13.P7
N$54: X13.P6
N$55: X13.P8
OUT_1: C6.2 U1.13 U1.14 U1.15 X3.14
OUT_2: C5.2 U1.16 U1.17 U1.18 X3.13
OUT_3: C4.2 U1.19 U1.20 U1.21 X3.12
OUT_4: C3.2 U1.22 U1.23 U1.24 X3.11
OUT_5: C10.2 U2.13 U2.14 U2.15 X3.10
OUT_6: C9.2 U2.16 U2.17 U2.18 X3.9
OUT_7: C8.2 U2.19 U2.20 U2.21 X3.8
OUT_8: C7.2 U2.22 U2.23 U2.24 X3.7
OUT_9: C14.2 U3.13 U3.14 U3.15 X3.6
OUT_10: C13.2 U3.16 U3.17 U3.18 X3.5
OUT_11: C12.2 U3.19 U3.20 U3.21 X3.4
OUT_12: C11.2 U3.22 U3.23 U3.24 X3.3
P8_07: R1.1 X2.P7
P8_08: R2.1 X2.P8
P8_09: R3.1 X2.P9
P8_10: R4.1 X2.P10
P8_11: R5.1 X2.P11
P8_12: R6.1 X2.P12
P8_13: R7.1 X2.P13
P8_14: R8.1 X2.P14
P8_15: OC3.16 R34.1 X2.P15
P8_16: OC3.14 R35.1 X2.P16
P8_17: OC3.12 R36.1 X2.P17
P8_18: OC3.10 R37.1 X2.P18
P8_19: X2.P19
P8_26: X2.P26
P8_27: R20.1 X2.P27
P8_28: R19.1 X2.P28
P8_29: R18.1 X2.P29
P8_30: R9.1 X2.P30
P8_39: OC5.10 R28.1 X2.P39
P8_40: OC5.12 R27.1 X2.P40
P8_41: OC5.14 R26.1 X2.P41
P8_42: OC5.16 R25.1 X2.P42
P8_43: OC6.10 R52.1 X2.P43
P8_44: OC6.12 R51.1 X2.P44
P8_45: OC6.14 R50.1 X2.P45
P8_46: OC6.16 R41.1 X2.P46
P9_12: X1.P12
P9_14: R63.1 X1.P14
P9_15: R64.1 X1.P15
P9_16: X1.P16
P9_23: X1.P23
P9_27: X1.P27
P9_30: X1.P30
P9_41: X1.P41
P9_42: X1.P42
PE: C19.1 C20.1 C21.1 C22.1 C27.1 C28.1 C29.1 C30.1 C35.1 C36.1 C37.1 C38.1 C39.2 C40.1 C43.1 C44.1 C45.1 C46.1 C47.1 C53.1 C54.1 C55.1 C56.1 C57.1 C58.1 C59.1 C60.1 C61.1 C62.1 C63.1 C65.2 C66.2 T1.1 T1.4 X4.13 X4.14
PWR_BUT: X1.P9
SYS5V: L1.1 X1.P7 X1.P8
SYS5V_F: C41.1 C42.2 L1.2 OC7.3 OC7.10 OC7.12 OC7.14 OC7.16 R65.1 R65.2 X5.A3 X6.A3 X7.A3 X8.A3
SYS5V_ON: OC7.13 X13.P3
SYS_RESET: T1.2 X1.P10
UART1_RXD: X1.P26
UART1_TXD: X1.P24
UART2_RXD: X1.P22
UART2_TXD: X1.P21
UART4_RXD: X1.P11
UART4_TXD: X1.P13
VADC_1.8V: X1.P32 X5.B10
VDD5V: X1.P5 X1.P6